# Altium PCB GeigerCounter_CHU.PcbDoc
Units mil, origin at the board's own origin, x right, y up, seen from the top; angles counter-clockwise.
Board outline 5000 x 3000 mil, 2 copper layers (Top Layer, Bottom Layer); 41 components, 29 nets, 133 pads, 2 vias.
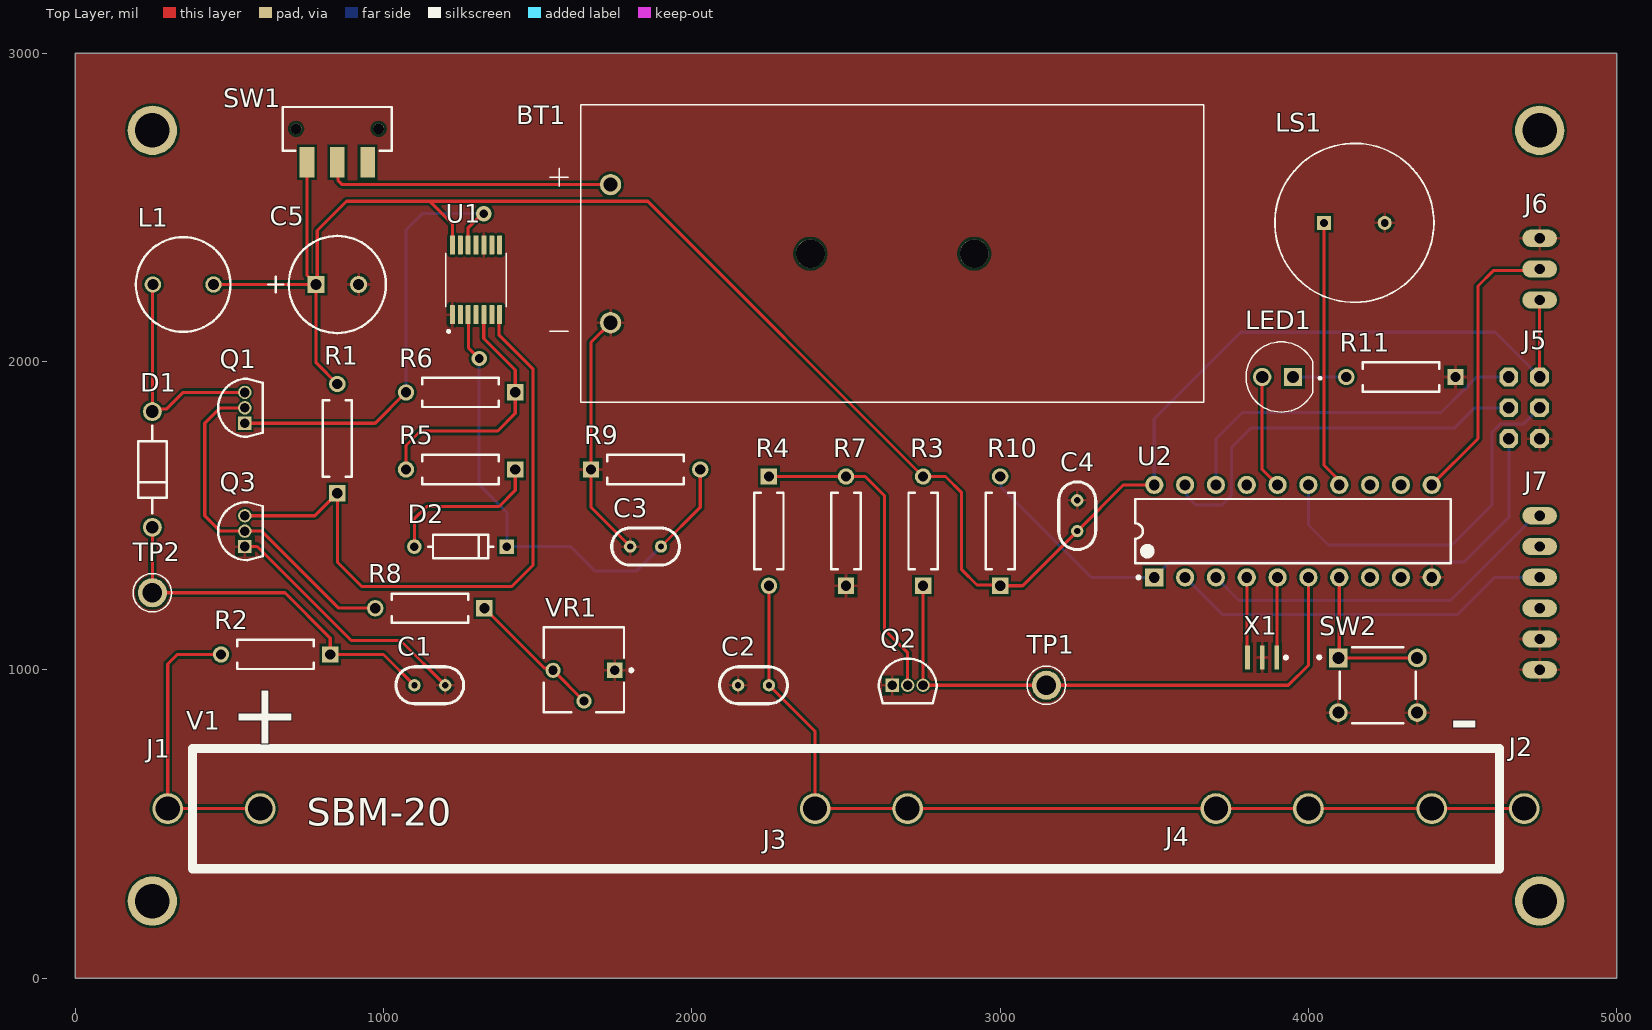
[diagram p0: Top Layer view]
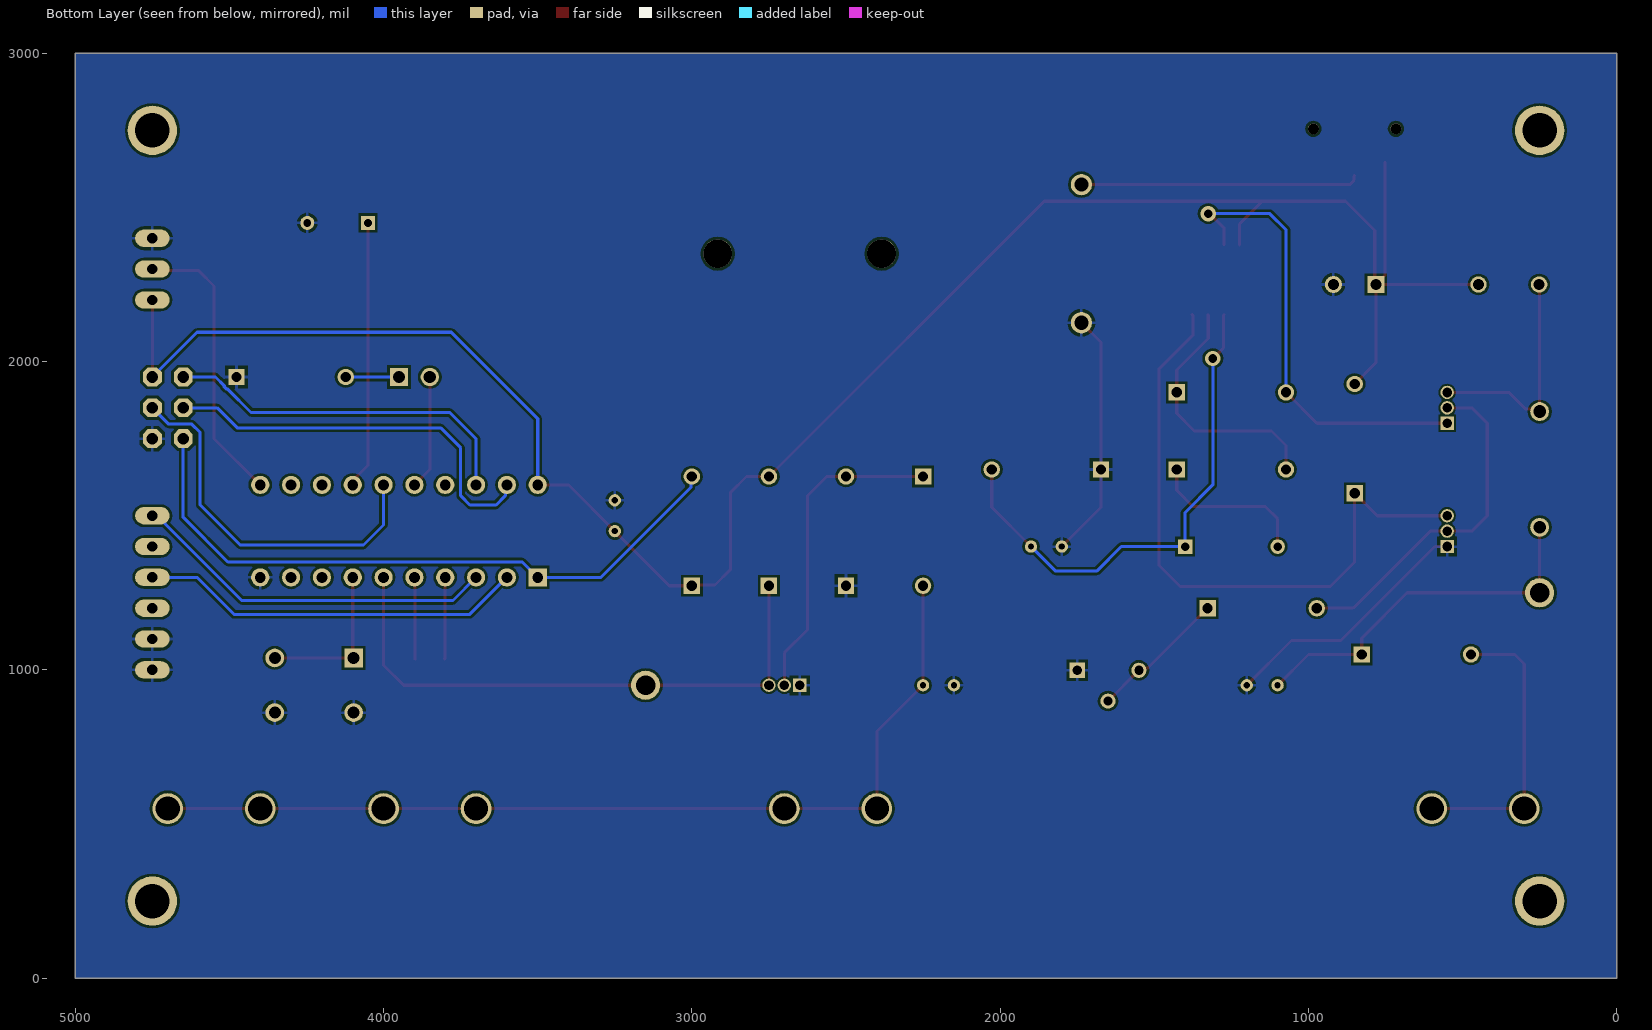
[diagram p1: Bottom Layer view, seen from below]
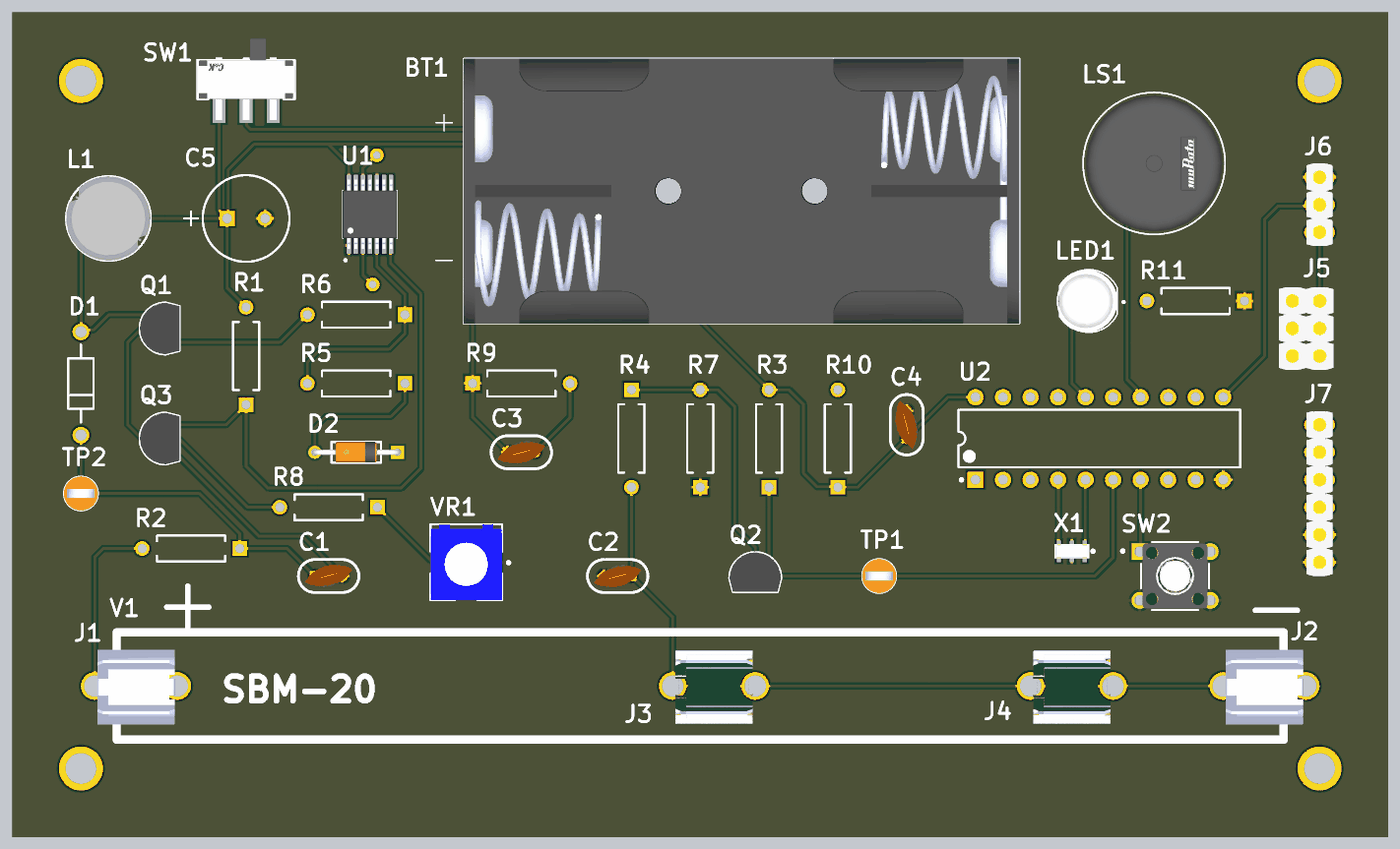
[diagram p2: 3D render of the assembled board from above, using the file's embedded part models]

## Layer stack, top to bottom
Top Solder: solder mask 0.4, Solder Resist, Dk 3.5
Top Layer: signal copper 1.4
Dielectric 1: dielectric 12.6, FR-4, Dk 4.8
Bottom Layer: signal copper 1.4
Bottom Solder: solder mask 0.4, Solder Resist, Dk 3.5

## Board outline
0,0 5000,0 5000,3000 0,3000

## Design rules (kind name [scope] priority, off if disabled: settings)
Clearance Q1 [InComponent('Q1','Q2','Q3')] p1: gap=6 ignorepadtopadclearanceinfootprint=FALSE
Clearance [All] p2: gap=8 ignorepadtopadclearanceinfootprint=FALSE
ComponentClearance SBM-20 [(InComponent('J1') OR InComponent('J2') OR InComponent('J3') OR InComponent('J4')) vs InComponent('V1')] p1: gap=-100 collisioncheckmode=3 verticalgap=-100 showdistances=FALSE
ComponentClearance [All] p2: gap=10 collisioncheckmode=3 verticalgap=10 showdistances=FALSE
HoleSize [All] p1: absolutevalues=TRUE maxlimit=1000 minlimit=1 maxpercent=80.000 minpercent=20.000
MinimumSolderMaskSliver [All] p1 off: minsoldermaskwidth=10
PolygonConnect [All] p1: connectstyle=Relief reliefconductorwidth=10 reliefentries=4 polygonreliefangle="90 Angle" airgapwidth=10
RoutingVias [All] p1: holewidth=28 width=50 viastyle="Through Hole" minholewidth=28 minwidth=50 maxholewidth=28 maxwidth=50
SolderMaskExpansion [All] p1: expansion=4 istentingtop=FALSE
Width [All] p1: maxlimit=10 minlimit=10 preferedwidth=10
27 further rules are at their usual default settings.

## Classes and differential pairs
component class U_uC: J5 J6 J7 LED1 LS1 R10 R11 SW2 U2 X1
component class U_PowerSupply: C1 C3 D1 D2 L1 Q1 Q3 R1 R5 R6 R8 R9 TP2 U1 VR1
component class U_Impulse: C2 Q2 R3 R4 R7 TP1
component class Top: BT1 C4 C5 J1 J2 J3 J4 R2 SW1 V1

## Components (designator, comment, footprint, x,y, rotation, side; value= is the part's Value field where it differs from the comment)
BT1 "BC2AAAPC" BAT_BC2AAAPC 2650,2350 r0 top
C1 "0.01uF" CAPDISC2PIN 1100,950 r0 top
C2 "220pF" CAPDISC2PIN 2250,950 r180 top
C3 "1nF" CAPDISC2PIN 1900,1400 r180 top
C4 "0.1uF" CAPDISC2PIN 3250,1450 r90 top
C5 "100uF" CAPRADIAL2PIN 850,2250 r0 top
D1 "1N4937" ONSC-AXIAL_LEAD-2-59-10_P 250,1650 r90 top
D2 "1N914B" FP-017AG-MFG 1250,1400 r180 top value=4pF
J1 "Fuse Holder" "Fuse Clip" 450,550 r180 top
J2 "Fuse Holder" "Fuse Clip" 4550,550 r180 top
J3 "Fuse Holder" "Fuse Clip" 2550,550 r180 top
J4 "Fuse Holder" "Fuse Clip" 3850,550 r180 top
J5 "Connector 2x3" HEADER2X03 4700,1850 r90 top
J6 "Connector 1x3" HEADER1X3 4750,2300 r90 top
J7 "Connector 1x6" HEADER1X6 4750,1250 r90 top
L1 "Wurth 744742103-CHU" WE-TI-L 350,2250 r0 top
LED1 "151054RS03000" LED_151054RS03000 3900,1950 r180 top
LS1 "CMP-06202-000007-1" FP-PKM13EPYH4002-B0-MFG 4150,2450 r0 top
Q1 "Nexperia PHD13003C,412-CHU" FAIR-TO-92 550,1850 r90 top
Q2 "2N3904BU" FAIR-TO-92 2700,950 r0 top
Q3 "2N3904BU" FAIR-TO-92 550,1450 r90 top
R1 "10K" ResAxial 850,1750 r90 top
R2 "4.7M" ResAxial 650,1050 r180 top
R3 "10K" ResAxial 2750,1450 r90 top
R4 "22K" ResAxial 2250,1450 r270 top
R5 "1K" ResAxial 1250,1650 r180 top
R6 "330" ResAxial 1250,1900 r180 top
R7 "100K" ResAxial 2500,1450 r90 top
R8 "15" ResAxial 1150,1200 r180 top
R9 "220K" ResAxial 1850,1650 r0 top
R10 "10K" ResAxial 3000,1450 r90 top
R11 "100" ResAxial 4300,1950 r180 top
SW1 "JS102011SAQN" FP-JS102011SAQN-MFG 850,2755 r180 top
SW2 "2-1825910-7" FP-2-1825910-7-MFG 4225,950 r90 top
TP1 "5013" TESTPOINT_5013 3150,950 r0 top
TP2 "5013" TESTPOINT_5013 250,1250 r0 top
U1 "TI TLC555CPW-CHU" "TI TLC555CPW-CHU" 1300,2265 r90 top
U2 "ATtiny2313V-10PU" 20P3 3950,1450 r90 top
V1 "SMB-20" SBM-20 2540,545 r0 top
VR1 "Bornes 3386P-1-100LF-CHU" BOUR-3362P 1650,1000 r180 top
X1 "CSTCE8M00G55-R0" MURA-CSTCE_G_A-3_V 3850,1040 r180 top

## Footprints (in the part's own frame and the unit in brackets; to place one, negate y for a bottom-side part, rotate by r counter-clockwise, add the part's x,y. Pads: shape width x height; smd on the part's side, far side on the other; paste and mask are expansions set on the pad)
20P3 [mm]
  rect 1.5x1.5 hole 0.9: 1(-3.81,11.43)
  round 1.5 hole 0.9: 2(-3.81,8.89) 3(-3.81,6.35) 4(-3.81,3.81) 5(-3.81,1.27) 6(-3.81,-1.27) 7(-3.81,-3.81) 8(-3.81,-6.35) 9(-3.81,-8.89) 10(-3.81,-11.43) 11(3.81,-11.43) 12(3.81,-8.89) 13(3.81,-6.35) 14(3.81,-3.81) 15(3.81,-1.27) 16(3.81,1.27) 17(3.81,3.81) 18(3.81,6.35) 19(3.81,8.89) 20(3.81,11.43)
  silkscreen extent -3.93,-13 2.65,13, body extent -3.6,-12.95 3.6,12.95, height 5.08
BAT_BC2AAAPC [mm]
  round 1.755 hole 1.17: NEG(-23.205,-5.69) POS(-23.205,5.69)
  round 2.37 hole 2.37 unplated: ""(-6.745,0) ""(6.755,0)
  silkscreen extent -28.2,-12.25 25.66,12.25, body extent -25.68,-12.27 25.63,12.24, height 12.81
BOUR-3362P [mm]
  rect 1.25x1.25 hole 0.75: 1(-2.54,0.035)
  round 1.25 hole 0.75: 2(0,2.575) 3(2.54,0.035)
  silkscreen extent -4.03,-3.49 3.3,3.5, body extent -3.3,-3.49 3.3,3.5, height 4.5
CAPDISC2PIN [mil]
  round 40 hole 20: 1(0,0) 2(100,0)
  silkscreen extent -60,-60 160,60, body extent -37,-40 137,42, height 185
CAPRADIAL2PIN [mm]
  rect 1.4x1.4 hole 0.9: 1(-1.75,0)
  round 1.4 hole 0.9: 2(1.75,0)
  silkscreen extent -5.71,-4 4,4, body extent -4,-4 3.95,4, height 12.5
FAIR-TO-92 [mm]
  rect 1.1x1.1 hole 0.8: 1(-1.27,0)
  round 1.1 hole 0.8: 2(0,0) 3(1.27,0)
  silkscreen extent -2.39,-1.47 2.4,2.2, body extent -2.38,-1.47 2.38,2.19, height 4.82
FP-2-1825910-7-MFG [mm]
  rect 1.54x1.54 hole 0.99 paste-1000 mask+0: 1(2.25,3.25)
  round 1.54 hole 0.99 paste-1000 mask+0: 2(2.25,-3.25) 3(-2.25,3.25) 4(-2.25,-3.25)
  silkscreen extent -3.15,-3.15 3.15,4.95, body extent -3.24,-4.12 3.24,4.12, height 0.25
FP-017AG-MFG [mm]
  rect 1.2x1.2 hole 0.7 paste-1000 mask+0: 1(-3.813,0)
  round 1.2 hole 0.7 paste-1000 mask+0: 2(3.813,0)
  silkscreen extent -2.68,-0.95 2.68,0.95, body extent -4.51,-1.05 4.51,1.05, height 0.25
FP-JS102011SAQN-MFG [mm]
  rect 1.2x2.5 smd paste+0 mask+0: 1(-2.5,2.75) 2(0,2.75) 3(2.5,2.75)
  round 0.9 hole 0.9 unplated paste-1000 mask+0: ""(-3.4,0) ""(3.4,0)
  silkscreen extent -4.5,-1.8 4.5,1.8, body extent -4.6,-3.9 4.6,4.1, height 0.25
FP-PKM13EPYH4002-B0-MFG [mm]
  rect 1.15x1.15 hole 0.65 paste-1000 mask+0: 1(-2.525,0)
  round 1.15 hole 0.65 paste-1000 mask+0: 2(2.475,0)
  silkscreen extent -6.57,-6.55 6.52,6.55, body extent -6.68,-6.65 6.62,6.65, height 0.25
"Fuse Clip" [mil]
  round 100 hole 78: 1(-150,0) 2(150,0)
  body extent -140,-131 140,140, height 421
HEADER1X3 [mil]
  oval 56x112 / inner round 0 / far side oval 56x112 hole 33.46: 1(-100,0) 2(0,0) 3(100,0)
  body extent -150,-48 150,48, height 327
HEADER1X6 [mil]
  oval 56x112 / inner round 0 / far side oval 56x112 hole 33.46: 1(-250,0) 2(-150,0) 3(-50,0) 4(50,0) 5(150,0) 6(250,0)
  body extent -300,-48 300,48, height 327
HEADER2X03 [mil]
  oct 61.02x61.02 / inner round 0 / far side oct 61.02x61.02 hole 37.4: 1(100,50) 2(100,-50) 3(0,50) 4(0,-50) 5(-100,50) 6(-100,-50)
  body extent -150,-100 150,98, height 326
LED_151054RS03000 [mm]
  round 1.508 hole 1: A(1.27,0)
  rect 1.508x1.508 hole 1: C(-1.27,0)
  silkscreen extent -3.6,-2.9 2.6,2.9, body extent -2.95,-2.9 2.46,2.9, height 9.16
MURA-CSTCE_G_A-3_V [mm]
  rect 0.4x2 smd: 1(-1.2,0) 2(0,0) 3(1.2,0)
  silkscreen extent -2.08,-0.12 -1.83,0.12, body extent -1.6,-0.65 1.6,0.65, height 0.7
ONSC-AXIAL_LEAD-2-59-10_P [mm]
  round 1.55 hole 1.05: 1(-4.77,0) 2(4.77,0)
  silkscreen extent -3.59,-1.17 3.59,1.17, body extent -4.77,-1.26 4.77,1.27, height 2.47
ResAxial [mm]
  rect 1.35x1.35 hole 0.85: 1(-4.5,0)
  round 1.35 hole 0.85: 2(4.5,0)
  silkscreen extent -3.15,-1.2 3.15,1.2, body extent -4.77,-1.12 4.77,1.27, height 2.4
SBM-20 [mil]
  silkscreen extent -2160,-190 2080,200, body extent -2145,-213 2080,219, height 461
TESTPOINT_5013 [mm]
  round 2.4 hole 1.6: 1(0,0)
  silkscreen extent -1.59,-1.58 1.59,1.58, body extent -1.59,-1.59 1.59,1.59, height 8.14
"TI TLC555CPW-CHU" [mm]
  rrect25% 1.57x0.41 smd: 1(-2.87,1.95) 2(-2.87,1.3) 3(-2.87,0.65) 4(-2.87,0) 5(-2.87,-0.65) 6(-2.87,-1.3) 7(-2.87,-1.95) 8(2.87,-1.95) 9(2.87,-1.3) 10(2.87,-0.65) 11(2.87,0) 12(2.87,0.65) 13(2.87,1.3) 14(2.87,1.95)
  silkscreen extent -4.34,-2.5 2.2,2.5, body extent -3.2,-2.5 3.2,2.5, height 1.2
WE-TI-L [mm]
  round 1.35 hole 0.9: 1(-2.5,0) 2(2.5,0)
  silkscreen extent -3.9,-3.9 3.9,3.9, body extent -3.9,-3.9 3.89,3.9, height 9.5

## Part data
BT1: "BATTERY HOLDER AAA 2 CELL PC PIN", Package=None, Supplier Part Number 1=BC2AAAPC-ND, Availability=Unavailable, MF=MPD, MP=BC2AAAPC, Price=None, SnapEDA_Link=https://www.snapeda.com/parts/BC2AAAPC/MPD/view-part/4389080/?ref=snap, Supplier 1=Digi-Key
C1: "Ceramic Disc Capacitors .375LS .01UF 1KV 20%", Manufacturer=Vishay, Manufacturer PN=S103M47Z5UN63L0R, Supplier Part Number 1=BC5182-ND, Supplier 1=Digi-Key
C2: "Ceramic Disc Capacitors .2LS 220PF 1KVDC 10%", Manufacturer=Vishay, Manufacturer PN=S221K25Y5PN6TK5R, Supplier Part Number 1=57AC3695, Supplier 1=Newark
C3: "Multilayer Ceramic Capacitors (MLCC) - Leaded 1000pF 50volts 5% C0G 5mm LS", Manufacturer=Vishay, Manufacturer PN=K102J15C0GF5TH5
C4: "Multilayer Ceramic Capacitors (MLCC) - Leaded 0.1uF 50volts 10% X7R 2.5mm LS", Manufacturer=Vishay, Manufacturer PN=K104K15X7RF5TL2, Supplier Part Number 1=BC1084CT-ND, Supplier 1=Digi-Key
C5: "Aluminum Electrolytic Capacitors - Leaded 35volts 100uF", Manufacturer=Nichicon, Manufacturer PN=UPW1V101MPD, Supplier Part Number 1=7152745, Supplier 1=RSComponents
D1: library part CMP-0902-00177-1, "Fast-Recovery Rectifier, 2-Pin Axial_Lead, Pb-Free, Bulk Bag", Manufacturer="ON Semiconductor / Fairchild", ComponentLink1Description="Manufacturer URL", ComponentLink1URL=http://www.onsemi.com/, ComponentLink2Description=Datasheet, ComponentLink2URL=http://www.onsemi.com/pub_link/Collateral/1N4933-D.PDF, ComponentLink3Description="Package Specification", ComponentLink3URL=http://www.onsemi.cn/pub_link/Collateral/59-10.PDF, DatasheetVersion="Rev. 12", IFSM Max (A)=30, IO(rec) Max (A)=1, Manufacturer Part Number=1N4937, Mounting Technology="Through Hole", PackageDescription="2-Pin, Axial Lead, Diameter 2.35 mm", PackageReference=AXIAL_LEAD-2-59-10, PackageVersion="Rev. U, 02/2005", Packing="Bulk Bag", PartNumber=1N4937, RoHS=TRUE, Supplier 1=Avnet, Supplier Part Number 1=1N4937, Type="Fast Recovery", VRRM Max (V)=600
D2: library part CMP-07163-000001-1, "DIODE GEN PURP 100V 200MA DO35", Capacitance=4pF, Forward Current=300mA, Manufacturer="ON Semiconductor / Fairchild", Max Junction Temp=+175°C, Max Repetitive Reverse Voltage=100V, Max Surge Forward Current=1A, Package=017AG, Peak Reverse Current=5uA, Supplier Part Number 1=1N914B-ND, Temperature="-55°C to +175°C", Temperature Range Low=-55°C, Automotive=No, Category=Diode, ComponentLink2Description=Datasheet, ComponentLink2URL=https://www.onsemi.com/pub/Collateral/1N914-D.PDF, Device Class L1="Discrete Semiconductors", Device Class L2=Diodes, Device Class L3="Rectifier Diodes", Digikey Description="DIODE GEN PURP 100V 200MA DO35", Footprint Url=https://www.onsemi.com/pub/Collateral/017AG.PDF, Height=1.91mm, Lead Free=Yes, Manufacturer Part Number=1N914B, Mouser Description="Diodes - General Purpose, Power, Switching 100V Io/200mA BULK", Octopart=https://octopart.com/1n914b-on+semiconductor-84323163, Reverse Voltage=100V, RoHS=TRUE, Supplier 1=Digi-Key, Temperature Range High=+175°C
J1 J2 J3 J4: Manufacturer=LIttlefuse, Manufacturer PN=01020071Z, Supplier Part Number 1=F3781-ND, Supplier 1=Digi-Key
J5: "Male Header 2.54mm 2x3 TH", Manufacturer=Samtec, Manufacturer PN=BBD-103-T-A, Supplier Part Number 1=83T7811, Supplier 1=Newark
J6: "Male Header 2.54mm 1x3 TH", Manufacturer=Samtec, Manufacturer PN=BBS-103-T-A, Supplier Part Number 1=BBS-103-T-A-ND, Supplier 1=Digi-Key
J7: "Male Header 2.54mm 1x6 TH", Manufacturer=Samtec, Manufacturer PN=BBS-106-T-A, Supplier Part Number 1=BBS-106-T-A-ND, Supplier 1=Digi-Key
L1: library part CMP-00045-1, "Wurth 10000 H 10% Ferrite Leaded Inductor, 0.16A Idc, 25 Rdc WE-TI", Case/Package=Radial, Current Rating=150mA, Inductance=10000H, Manufacturer="Wurth Electronics", Manufacturer Part Number=744742103, Max DC Current=160mA, Max Operating Temperature=85°C, Min Operating Temperature=-25°C, Series Resistance=25R, Supplier Part Number 1=4890009, Tolerance=10%, Component Type=Inductors, Core Material=Ferrite, Diameter=8.5mm, Height=10mm, Lead Pitch=5mm, Mount=Radial, RoHS Compliant=Yes, Series=WE-TI, Supplier 1=RSComponents
LED1: "Red 623nm LED Indication - Discrete 1.9V Radial", Package="Radial WÃ¼rth Elektronik", Supplier Part Number 1=732-11408-ND, Availability=Unavailable, MF="Wurth Electronics", MP=151054RS03000, Price=None, SnapEDA_Link=https://www.snapeda.com/parts/151054RS03000/Wurth%20Electronics%20Inc./view-part/609365/?ref=snap, Supplier 1=Digi-Key
LS1: library part CMP-004-000004-1, "AUDIO PIEZO TRANSDUCER 30V TH", Frequency=4kHz, Max Operating Temperature=85°C, Max Supply Voltage=30V, Min Operating Temperature=-40°C, Nominal Input Voltage=3V, Package Quantity=1980, Design Item ID=CMP-06202-000007-1, Diameter=12.6mm, Height=6.9mm, Lead Free="Lead Free", Max Frequency=4kHz, Mount="Through Hole", Packaging=Bulk, Radiation Hardening=No, REACH SVHC="No SVHC", Self Resonant Frequency=4kHz, Source=GeigerLibrary_CHU.SCHLIB, Termination=Solder, Voltage Rating=3V, Voltage Rating (DC)=30V, Washable=No
Q1: library part CMP-00044-1, "Bipolar Transistors - BJT Single NPN 1.5A 2.1W", Case/Package=TO-226-3, Collector Base Voltage (VCBO)=700V, Collector Emitter Breakdown Voltage=400V, Collector-emitter Voltage-Max=1.5V, Manufacturer="NXP Semiconductors", Manufacturer Part Number=PHD13003C,412, Max Collector Current=1.5A, Max Operating Temperature=150°C, Max Power Dissipation=2.1W, Min Operating Temperature=-65°C, Package Quantity=2000, Collector Emitter Voltage (VCEO)=400V, Component Type="Integrated Circuits", Element Configuration=Single, hFE Min=8, Max Breakdown Voltage=400V, Mount="Through Hole", Number of Pins=3, Packaging=Bulk, Polarity=NPN, Radiation Hardening=No, RoHS Compliant=Yes, Supplier 1=Avnet, Supplier Part Number 1=PHD13003C,412
Q2 Q3: library part CMP-2000-04944-1, "NPN General-Purpose Amplifier, 40 V VCEO, 0.2 A, -55 to 150 degC, 2-Pin TO-92, RoHS, Bulk", Manufacturer="ON Semiconductor / Fairchild", Maximum Collector Base Voltage=60V, Maximum Collector Emitter Saturation Voltage=0.2@1mA@10mA, Maximum Collector Emitter Voltage=40V, Maximum DC Collector Current=0.2A, Maximum Operating Frequency=300(Min)MHz, Maximum Power Dissipation=625mW, Minimum DC Current Gain=40@0.1mA@1V, Operating Temperature=-55to150degC, Package=3TO-92, Package Description="3-Pin Transistor Outline Package, Body Dia 4.79 mm, Pitch 1.27 mm", Package Reference=TO-92, Supplier Part Number 1=2N3904FS-ND, Category=GPBJT, Datasheet URL=https://datasheet.ciiva.com/4722/2n3904-82270-4722369.pdf, Datasheet Version="Rev. 1.1.0, 10/2014", Manufacturer Part Number=2N3904BU, Manufacturer URL=https://www.fairchildsemi.com/, Mounting=ThroughHole, Packaging=Bulk, Pin Count=3, Rad Hard=No, Supplier 1=Digi-Key, Type=NPN
R1 R3 R10: "RES 10K OHM 1/4W 5% AXIAL", Manufacturer=Stackpole, Manufacturer PN=PCF14JT10K0, Package Type=Axial, Power="1/4 Watt", Tolerance=0.05, Supplier 1=Avnet, Supplier Part Number 1=PCF14JT10K0
R2: "RES 4.7M OHM 1/4W 5% AXIAL", Manufacturer=Stackpole, Manufacturer PN=PCF14JT4M70, Package Type=Axial, Power="1/4 Watt", Supplier Part Number 1=PCF14JT4M70CT-ND, Tolerance=0.05, Supplier 1=Digi-Key
R4: "RES 22K OHM 1/4W 5% AXIAL", Manufacturer=Stackpole, Manufacturer PN=PCF14JT22K0, Package Type=Axial, Power="1/4 Watt", Tolerance=0.05, Supplier 1=Avnet, Supplier Part Number 1=PCF14JT22K0
R5: "RES 1K OHM 1/4W 5% AXIAL", Manufacturer=Stackpole, Manufacturer PN=PCF14JT1K00, Package Type=Axial, Power="1/4 Watt", Tolerance=0.05, Supplier 1=Avnet, Supplier Part Number 1=PCF14JT1K00
R6: "RES 330 OHM 1/4W 5% AXIAL", Manufacturer=Stackpole, Manufacturer PN=PCF14JT330R, Package Type=Axial, Power="1/4 Watt", Tolerance=0.05, Supplier 1=Avnet, Supplier Part Number 1=PCF14JT330R
R7: "RES 100K OHM 1/4W 5% AXIAL", Manufacturer=Stackpole, Manufacturer PN=PCF14JT100K, Package Type=Axial, Power="1/4 Watt", Tolerance=0.05, Supplier 1=Avnet, Supplier Part Number 1=PCF14JT100K
R8: "RES 15 OHM 1/4W 5% AXIAL", Manufacturer=Stackpole, Manufacturer PN=PCF14JT15R0, Package Type=Axial, Power="1/4 Watt", Tolerance=0.05, Supplier 1=Avnet, Supplier Part Number 1=PCF14JT15R0
R9: "RES 220K OHM 1/4W 5% AXIAL", Manufacturer=Stackpole, Manufacturer PN=PCF14JT220K, Package Type=Axial, Power="1/4 Watt", Tolerance=0.05, Supplier 1=Avnet, Supplier Part Number 1=PCF14JT220K
R11: "RES 100 OHM 1/4W 5% AXIAL", Manufacturer=Stackpole, Manufacturer PN=PCF14JT100R, Package Type=Axial, Power="1/4 Watt", Supplier Part Number 1=35AH4605, Tolerance=0.05, Supplier 1=Newark
SW1: library part CMP-2000-06501-2, "SWITCH SLIDE SPDT 300MA 6V", Case/Package=100, Contact Current Rating=300mA, Contact Resistance=70mR, Manufacturer="ITT C&K", Max Operating Temperature=85°C, Max Voltage Rating (DC)=6V, Min Operating Temperature=-40°C, Package Quantity=1, Supplier Part Number 1=401-1999-1-ND, Actuator Length=2mm, Actuator Material=Nylon, Actuator Type=Standard, Contact Material="Copper Alloy", Contact Plating=Silver, Current Rating=300mA, Electrical Life=5000Cycles, Housing Material=Nylon, Illumination Type=Non-Illuminated, Lead Free="Lead Free", Length=9mm, Manufacturer Part Number=JS102011SAQN, Max Current Rating=300mA, Mount="Surface Mount", Orientation="Right Angle", Packaging="Tape and Reel", Radiation Hardening=No, REACH SVHC="No SVHC", Supplier 1=Digi-Key, Switch Function=On-On, Switch Travel=2mm, Termination="Gull Wing", Throw Configuration=SPDT, Voltage Rating (DC)=6V
SW2: library part CMP-03402-000004-1, "SWITCH TACTILE SPST-NO 0.05A 24V", Contact Current Rating=50mA, Contact Resistance=100mΩ, Manufacturer="TE Connectivity", Operating Force=160gf, Supplier Part Number 1=450-1642-ND, Temperature="-35°C to +85°C", Temperature Range High=+85°C, Temperature Range Low=-35°C, Voltage Rating Dc=24V, Automotive=No, Category=Switch, ComponentLink2Description=Datasheet, ComponentLink2URL=https://www.te.com/commerce/DocumentDelivery/DDEController?Action=showdoc&DocId=Customer+Drawing%7F1825910%7FC10%7Fpdf%7FEnglish%7FENG_CD_1825910_C10.pdf%7F2-1825910-7, Device Class L1=Electromechanical, Device Class L2=Switches, Device Class L3="Pushbutton Switches", Digikey Description="SWITCH TACTILE SPST-NO 0.05A 24V", Electromechanical Life=100000Cycles, Height=13.3mm, Lead Free=Yes, Manufacturer Part Number=2-1825910-7, Mount="Through Hole", Mouser Description="Switch Tactile OFF (ON) SPST Extended Round Button PC Pins 0.05A 24VDC 100000Cycles 1.57N Thru-Hole Loose", Octopart=https://octopart.com/2-1825910-7-te+connectivity-42270510, Package=2-1825910-7, RoHS=TRUE, Supplier 1=Digi-Key, Throw Configuration=SPST-NO
TP1 TP2: "Connector Header Surface Mount 6 position 0.039 _1.00mm_", Package="TO-5 Keystone", Supplier Part Number 1=36-5013-ND, Availability=Unavailable, DigiKey-Purchase-URL=https://snapeda.com/shop?store=DigiKey&id=500793, MF="Keystone Electronics", MP=5013, Price=None, SnapEDA_Link=https://www.snapeda.com/parts/5013/Keystone%20Electronics/view-part/500793/?ref=snap, Supplier 1=Digi-Key
U1: library part CMP-00081-1, "IC OSC SGL TIMER 2.1MHZ 14TSSOP", Case/Package=TSSOP, Frequency=2.1MHz, High Level Output Current=-10mA, Low Level Output Current=100mA, Manufacturer="Texas Instruments", Manufacturer Part Number=TLC555CPW, Max Operating Temperature=125°C, Max Power Dissipation=525mW, Max Supply Voltage=15V, Min Operating Temperature=-40°C, Min Supply Voltage=2V, Nominal Supply Current=250uA, Operating Supply Current=360uA, Package Quantity=90, Supplier Part Number 1=TLC555CPW-ND, Component Type="Integrated Circuits", Height=1.05mm, Lead Free="Lead Free", Length=5.1mm, Mount="Surface Mount", Number of Pins=14, Number of Timers/Counters=1, Packaging=Rail/Tube, Power Dissipation=525mW, Quiescent Current=250uA, Radiation Hardening=No, RoHS Compliant=Yes, Series=LinCMOS™, Supplier 1=Digi-Key, Supply Current=250uA, Weight=0.002018oz, Width=4.5mm
U2: library part CMP-0093-00017-2, "Low Power tinyAVR® 8-Bit Microcontroller, 1.8-5.5V, 10MHz, 2K Flash Memory, Industrial Grade (-40°C to 85°C), 20-Lead PDIP, Pb-Free", Manufacturer="Microchip / Atmel", Manufacturer Part Number=ATTINY2313V-10PU, Code_JEDEC=MS-001-AD, ComponentLink1Description="Manufacturer URL", ComponentLink1URL=http://www.atmel.com/, ComponentLink2Description="ATtiny2313 Datasheet", ComponentLink2URL=http://www.atmel.com/dyn/resources/prod_documents/doc2543.pdf, ComponentLink3Description="ATtiny2313 Summary", ComponentLink3URL=http://www.atmel.com/dyn/resources/prod_documents/doc2543S.pdf, DatasheetVersion="revL, Aug-2010", PackageDescription="20-lead (0.300\"/7.62mm Wide) Plastic Dual Inline Package (PDIP)", PackageReference=20P3, PackageVersion="revD, Oct-2010", RevisionNote="DatasheetVersion & PackageVersion updated. URLs added.", Supplier 1=Avnet, Supplier Part Number 1=ATTINY2313V-10PU
V1: library part SBM-20-CHU, "SMB-20 Geiger-Muller Tube", Manufacturer="Where Sold", Manufacturer PN=SMB-20
VR1: library part CMP-00043-1, "TRIMMER 10 OHM 0.5W PC PIN TOP", Manufacturer=Bourns, Manufacturer Part Number=3386P-1-100LF, Max Operating Temperature=125°C, Max Power Dissipation=500mW, Min Operating Temperature=-55°C, Package Quantity=100, Resistance=10R, Resistance Tolerance=10%, Resistor Type=Cermet, Supplier Part Number 1=3386P-1-100LF-ND, Temperature Coefficient=100ppm/°C, Voltage Rating=300V, Voltage Rating (DC)=500V, Component Type=Resistors, Contact Plating=Tin,Matte, Depth=9.53mm, Height=0.19inch, Length=9.53mm, Military Standard=Not, Mount="Through Hole", Number of Turns=1, Packaging=Rail/Tube, Power Rating=500mW, Radiation Hardening=No, REACH SVHC="No SVHC", RoHS Compliant=Yes, Series="Trimpot® 3386 - Sealed", Supplier 1=Digi-Key, Taper=Linear, Technology=CERMET, Termination=Pin, Tolerance=10%, Weight=0.03oz, Width=9.53mm
X1: library part CMP-2100-03620-1, "Ceramic Resonator, 8 MHz, +/- 0.5%, -20 to 80 degC, 3-Pin SMD, RoHS, Tape and Reel", Capacitance=33pF, Case/Package=Ceramic, Frequency=8MHz, Frequency Stability=0.2%, Frequency Tolerance=0.5%, Manufacturer=Murata, Max Operating Temperature=80degC, Min Operating Temperature=-20degC, Package Description="3-Pin Surface Mount Device, Body 3.2 x 1.3 mm, Pitch 1.2 mm", Package Quantity=1, Package Reference=CSTCE_G_A-3, Supplier Part Number 1=726483, Composition=Ceramic, Contact Plating=Gold, Datasheet URL=http://www.murata.com/~/media/webrenewal/support/library/catalog/products/timingdevice/ceralock/p16e.ashx, Datasheet Version=42339.0, Height=0.031inch, Lead Free=LeadFree, Length=0.126inch, Load Capacitance=33pF, Manufacturer Part Number=CSTCE8M00G55-R0, Manufacturer URL=http://www.murata.com/, Mount=SurfaceMount, Number of Pins=3, Packaging=TapeandReel, REACH SVHC=NoSVHC, RoHSCompliant=True, Self Resonant Frequency=8MHz, Supplier 1=Conrad, Termination=SMD/SMT, Tolerance=0.5%, Width=0.051inch

## Free pads (board coordinates)
  round 160 hole 112: MH1(250,250) MH2(250,2750) MH3(4750,2750) MH4(4750,250)

## Via types
v1: diameter 50, hole 28, Top Layer to Bottom Layer, 2 vias

## Nets (pads, with @x,y where several pads share a name; then routed paths per layer and width w, separated by ;. In a path a pad name is that pad's centre, name@x,y a point inside that pad or via, vN(x,y) a via of type N, cw(c..) or ccw(c..) an arc to the next point about the centre after c; other vN are vias at no path point)
GM_PULSE: Q2.3 R3.1 TP1.1 U2.6 | length 1884.8
  Top Layer w10: R3.1 Q2.3 TP1.1 3935,950 4000,1015 U2.6
GND: BT1.NEG C1.2 C2.2 C3.2 C4.2 C5.2 J5.6 J6.3 J7.1 J7.2 LS1.2 Q2.1 Q3.1 R7.1 R9.1 R11.1 SW2.3 SW2.4 U1.1 U1.10 U2.10 VR1.1 X1.2 | length 1645.4
  Top Layer w10: Q3.1 590,1400 895,1095 1055,1095 C1.2 ; BT1.NEG 1672.83,2062.4 R9.1 1672.83,1527.17 C3.2
  Bottom Layer w10: R9.1@1670,1652.83 R9.1
NetBT1_POS: BT1.POS SW1.2 | length 906.9
  Top Layer w10: SW1.2@850,2603.48 850.66,2603.48 851.62,2602.52 851.62,2588.38 865.98,2574.02 BT1.POS
NetC1_1: C1.1 D1.1 R2.1 TP2.1 | length 1217.4
  Top Layer w10: D1.1 TP2.1 680,1250 827.17,1102.83 R2.1 1000,1050 C1.1
NetC2_1: C2.1 J2.1 J2.2 J3.1 J3.2 J4.1 J4.2 R4.2 | length 3085
  Top Layer w10: R4.2 C2.1 2400,800 J3.2 J3.1 J4.2 J4.1 J2.2 J2.1
NetC3_1: C3.1 D2.1 R9.2 U1.3 | length 1672.9
  Top Layer w10: U1.3 1275,2151.42 1275,2045 v1(1310,2010) ; C3.1 2027.17,1527.17 R9.2
  Bottom Layer w10: v1(1310,2010) 1310,1600 1400.12,1509.88 D2.1 1606.87,1400 1686.87,1320 1820,1320 1874.63,1374.63 C3.1
NetD1_2: D1.2 L1.1 Q1.3 | length 737.5
  Top Layer w10: D1.2 D1.2@250.79,1838.58 ; L1.1 250.79,2249.21 D1.2@250.79,1838.58 ; Q1.3 350,1900 295.51,1845.51 257.72,1845.51 D1.2@250.79,1838.58
NetD2_2: D2.2 R5.1 | length 523.2
  Top Layer w10: D2.2 1099.88,1489.88 1140,1530 1375,1530 1427.17,1582.17 R5.1
NetJ1_1: J1.1 J1.2 R2.2 | length 954.8
  Top Layer w10: R2.2 330.86,1050 300,1019.14 J1.2 J1.1
NetJ5_1: J5.1 U2.18 | length 1185
  Bottom Layer w10: U2.18 3700,1750 3785,1835 4430,1835 4505.43,1910.43 4509.12,1910.43 4516.74,1918.04 4516.74,1921.74 4545,1950 J5.1
NetJ5_3: J5.3 U2.19 | length 1315.8
  Bottom Layer w10: U2.19 3605,1595 3605,1565 3635,1535 3720,1535 3750,1565 3750,1720 3815,1785 4475,1785 4540,1850 J5.3
NetJ5_4: J5.4 U2.15 | length 1228.9
  Bottom Layer w10: U2.15 4000,1470 4065,1405 4465,1405 4595,1535 4595,1770 4621.89,1796.89 4696.89,1796.89 J5.4
NetJ5_5: J5.5 R10.2 U2.1 | length 2140.1
  Bottom Layer w10: R10.2 3003.32,1623.85 3003.32,1591.68 3295,1300 U2.1 3550,1350 4505,1350 4650,1495 J5.5
NetJ6_2: J6.2 U2.11 | length 929.9
  Top Layer w10: U2.11 4550,1750 4550,2245 4600,2295 4745,2295 J6.2
NetJ7_4: J7.4 U2.2 | length 1249.4
  Bottom Layer w10: U2.2 3720,1180 4485,1180 4605,1300 J7.4
NetJ7_6: J7.6 U2.3 | length 1195.3
  Bottom Layer w10: U2.3 3775,1225 4460,1225 4708.09,1473.09 4708.09,1473.65 4734.45,1500 J7.6
NetLED1_A: LED1.A U2.16 | length 370.7
  Top Layer w10: LED1.A 3850,1650 U2.16
NetLED1_C: LED1.C R11.2 | length 172.8
  Bottom Layer w10: LED1.C R11.2
NetLS1_1: LS1.1 U2.14 | length 870.5
  Top Layer w10: LS1.1 4050.57,1663.56 4085.58,1628.55 4085.58,1627.69 4100,1613.27 U2.14
NetQ1_1: Q1.1 R6.2 U1.12 | length 1491.8
  Top Layer w10: Q1.1 972.83,1800 R6.2 ; U1.12 1274.41,2434.41 1320,2480 v1(1325,2480)
  Bottom Layer w10: R6.2 1072.83,2427.83 1125,2480 v1(1325,2480)
NetQ1_2: Q1.2 Q3.2 R8.2 | length 1127.8
  Top Layer w10: Q1.2 470,1850 420,1800 420,1500 470,1450 Q3.2 605,1450 855,1200 R8.2
NetQ2_2: Q2.2 R4.1 R7.2 | length 1046.8
  Top Layer w10: R4.1 2562.83,1627.17 2625,1565 2625,1130 2700,1055 Q2.2
NetQ3_3: Q3.3 R1.1 U1.7 | length 2108.4
  Top Layer w10: Q3.3 777.17,1500 R1.1 850,1350 930,1270 1415,1270 1485,1340 1485,1975 1375,2085 1375,2150.24 U1.7
NetR5_2: R5.2 R6.1 U1.5 | length 837.8
  Top Layer w10: R5.2 1072.83,1727.83 1120,1775 1370,1775 1427.17,1832.17 R6.1 1427.17,1972.83 1325.04,2074.96 1325.04,2151.46 U1.5
NetR8_1: R8.1 VR1.2 VR1.3 | length 447.7
  Top Layer w10: R8.1 1521.04,1006.12 1542.5,1006.12 VR1.3 VR1.2
NetSW2_1: SW2.1 SW2.2 U2.7 | length 526.5
  Top Layer w10: U2.7 4100,1060.63 4122.05,1038.58 SW2.2@4377.95,1038.58
NetU2_4: U2.4 X1.3 | length 266.1
  Top Layer w10: U2.4 3801.38,1298.62 3801.38,1036.38 X1.3@3802.76,1035
NetU2_5: U2.5 X1.1 | length 266.1
  Top Layer w10: X1.1@3897.24,1035 3898.62,1036.38 3898.62,1298.62 U2.5
VCC: C4.1 C5.1 J5.2 J6.1 L1.2 R1.2 R3.2 R10.1 SW1.3 U1.14 U2.20 | length 6885.9
  Top Layer w10: L1.2 C5.1 ; SW1.3 751.57,2279.53 C5.1 ; R1.2 781.1,1996.06 C5.1 ; U1.14 1223.23,2446.77 1150,2520 ; U2.20 3400,1600 C4.1 3072.83,1272.83 R10.1 2997.83,1275 2925,1275 2875,1325 2875,1575 2822.83,1627.17 R3.2 1857.17,2520 1150,2520 ; J5.2 J6.1 ; C5.1 785,2253.9 785,2425 880,2520 1150,2520
  Bottom Layer w10: U2.20 3500,1815 3780,2095 4605,2095 J5.2
pads on no net: BT1. J7.3 J7.5 SW1. SW1.1 U1.2 U1.4 U1.6 U1.8 U1.9 U1.11 U1.13 U2.8 U2.9 U2.12 U2.13 U2.17

## Polygon pours and split planes (outlines as drawn)
GND on Top Layer "Top" (solid, pour order 0): 0,0 5000,0 5000,3000 0,3000
GND on Bottom Layer "Bottom" (solid, pour order 1): 0,0 5000,0 5000,3000 0,3000

## Silkscreen, mask and mechanical layers (free items; w line width, h text height)
Mechanical 1:
  the board outline again, w8

## Text inside footprints (layer, text, board x,y; h text height)
V1: Top Overlay "+" at 501,759.68 h200; Top Overlay "-" at 4456,748.03 h200; Top Overlay "SBM-20" at 750,495 h90